# Altium PCB HumRigid1.PcbDoc
Units mm, origin at the board's own origin, x right, y up, seen from the top; angles counter-clockwise.
Board outline 100 x 100 mm, 4 copper layers (Top Layer, Layer 1, Layer 2, Bottom Layer), stack 0.603 mm thick; 72 components, 57 nets, 298 pads, 221 vias.
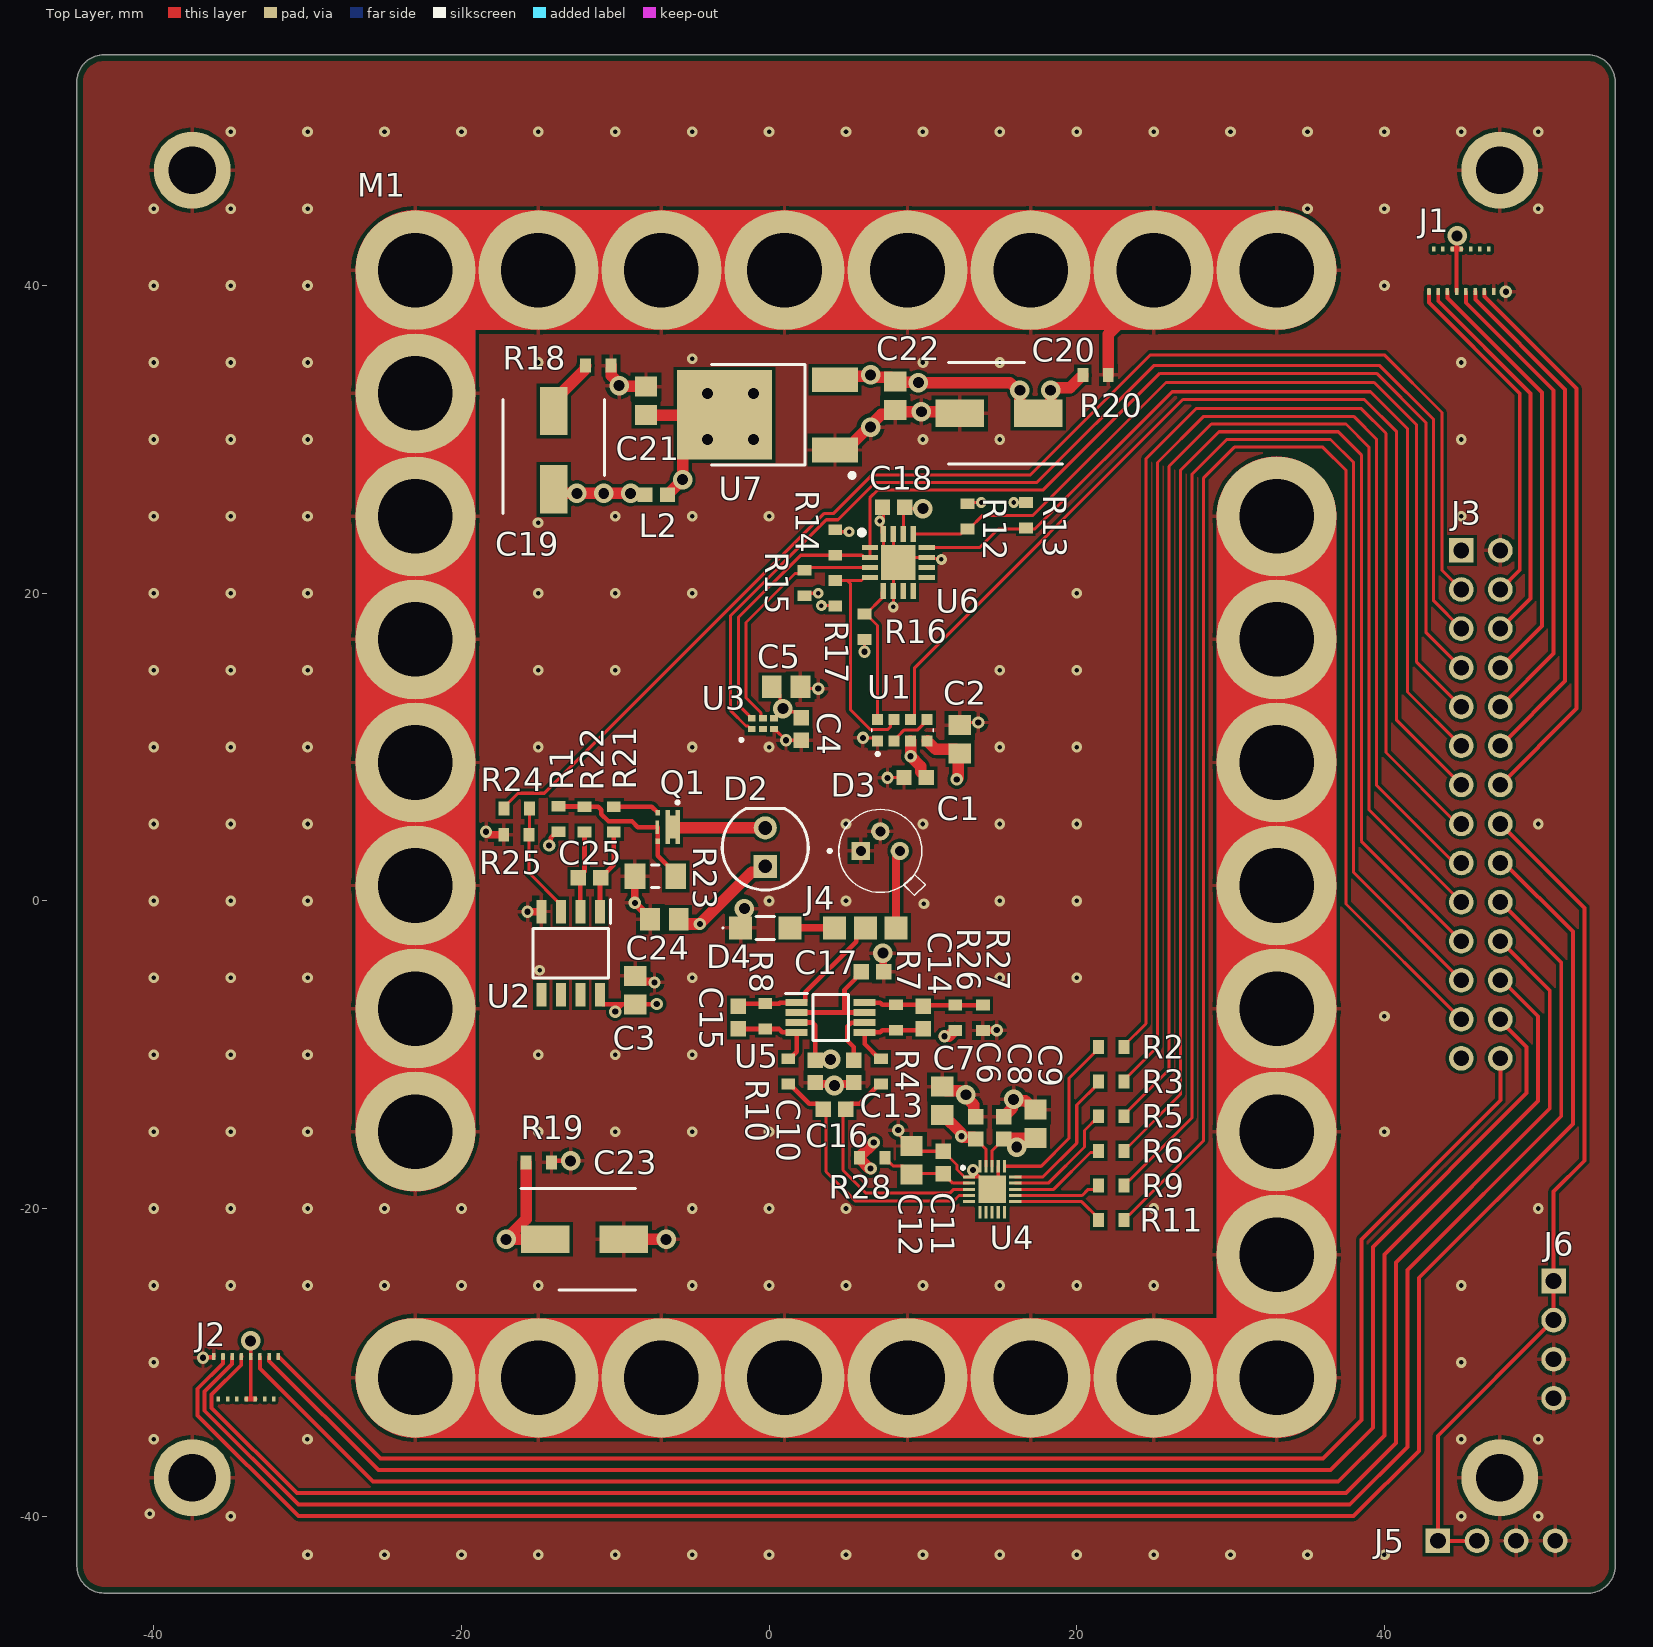
[diagram p0: Top Layer view]
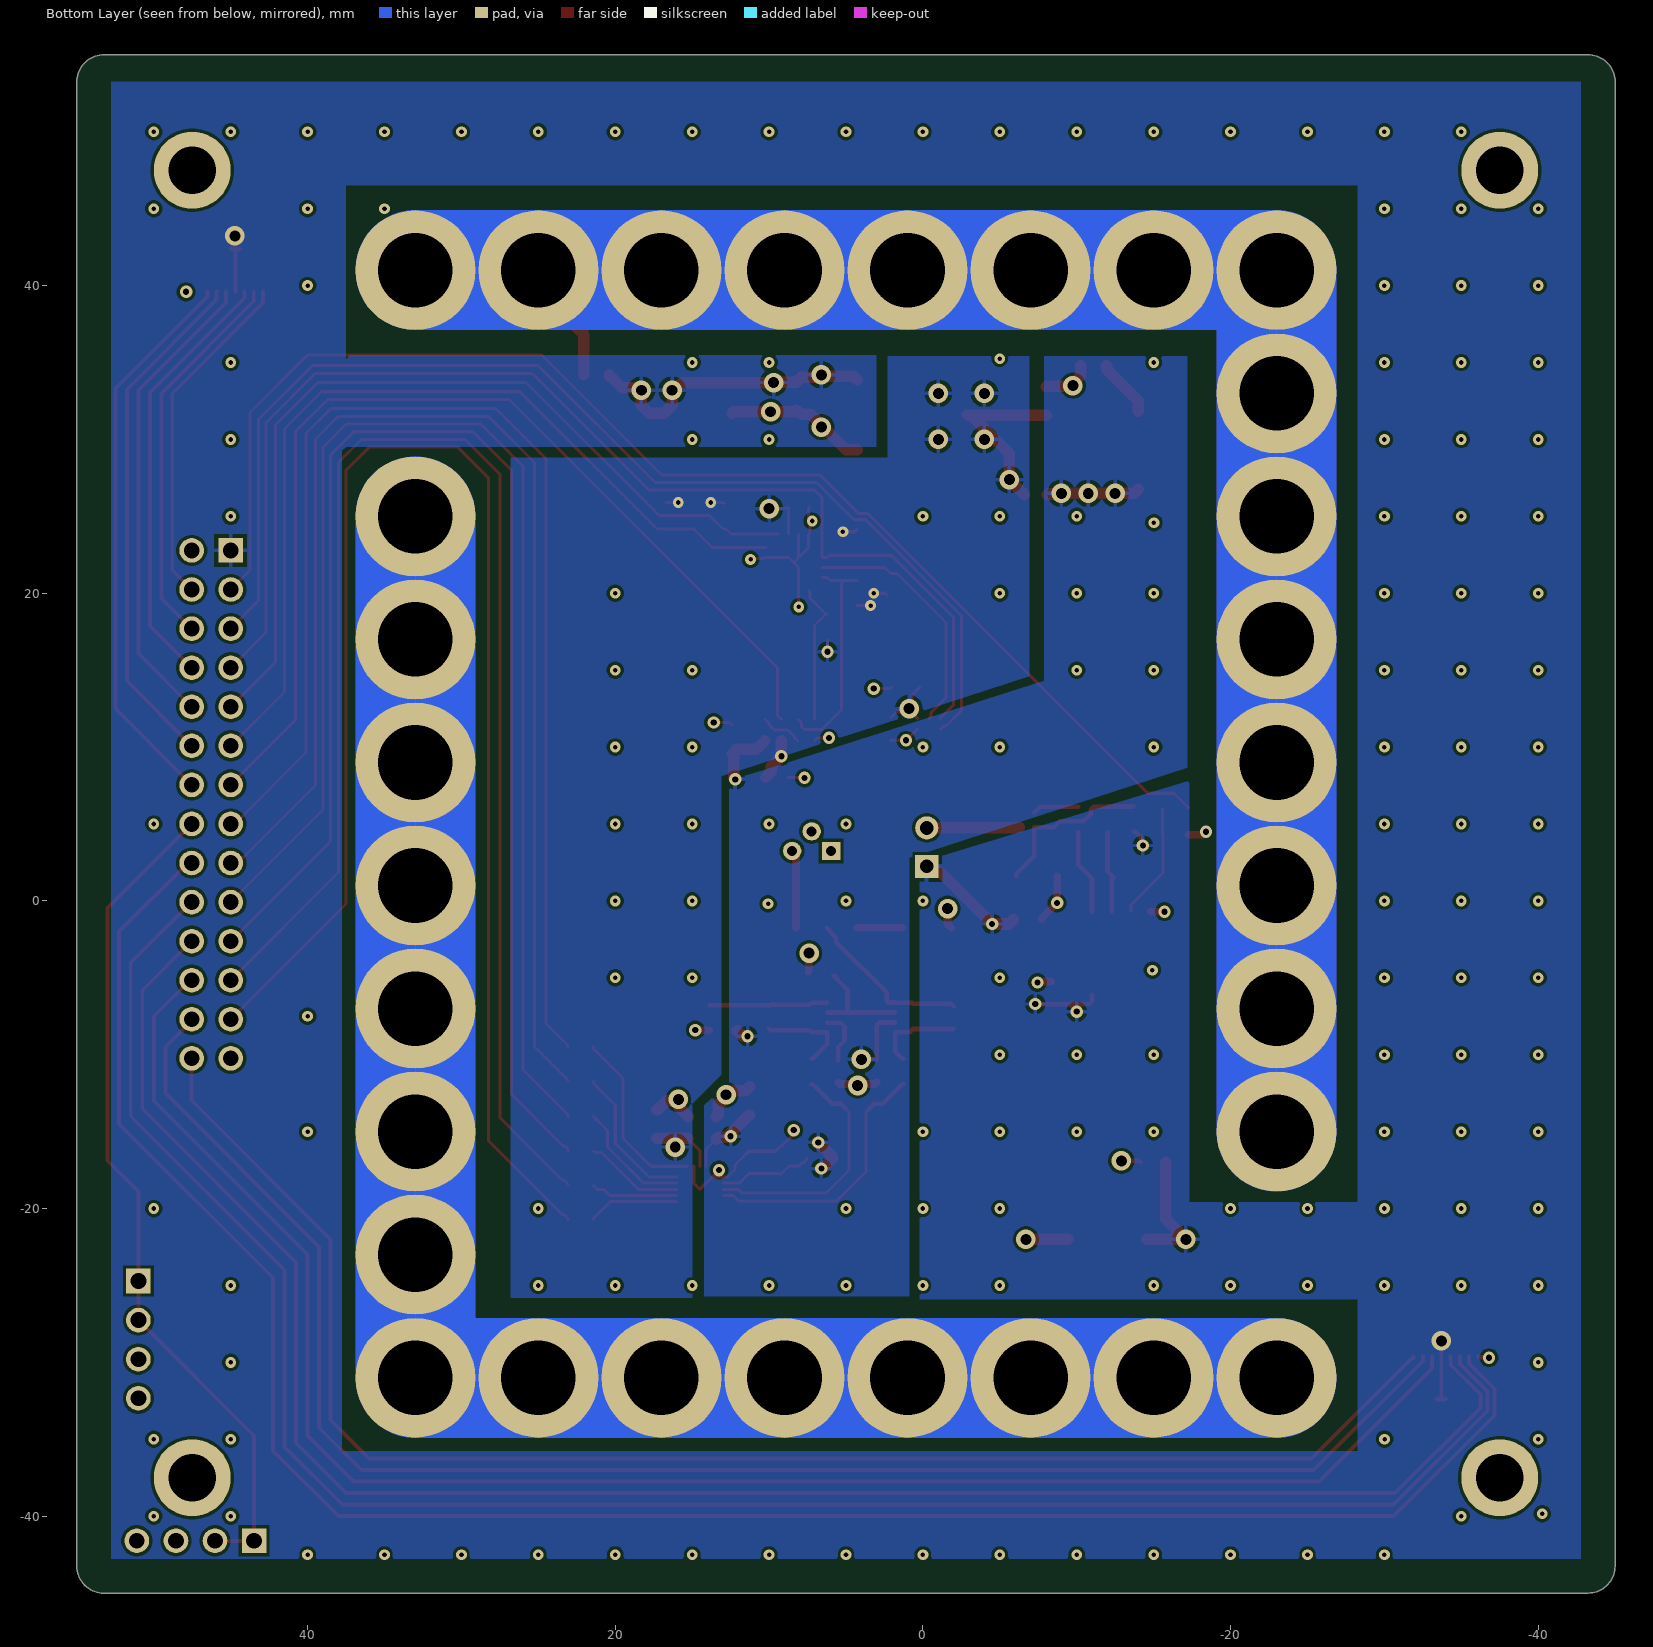
[diagram p1: Bottom Layer view, seen from below]
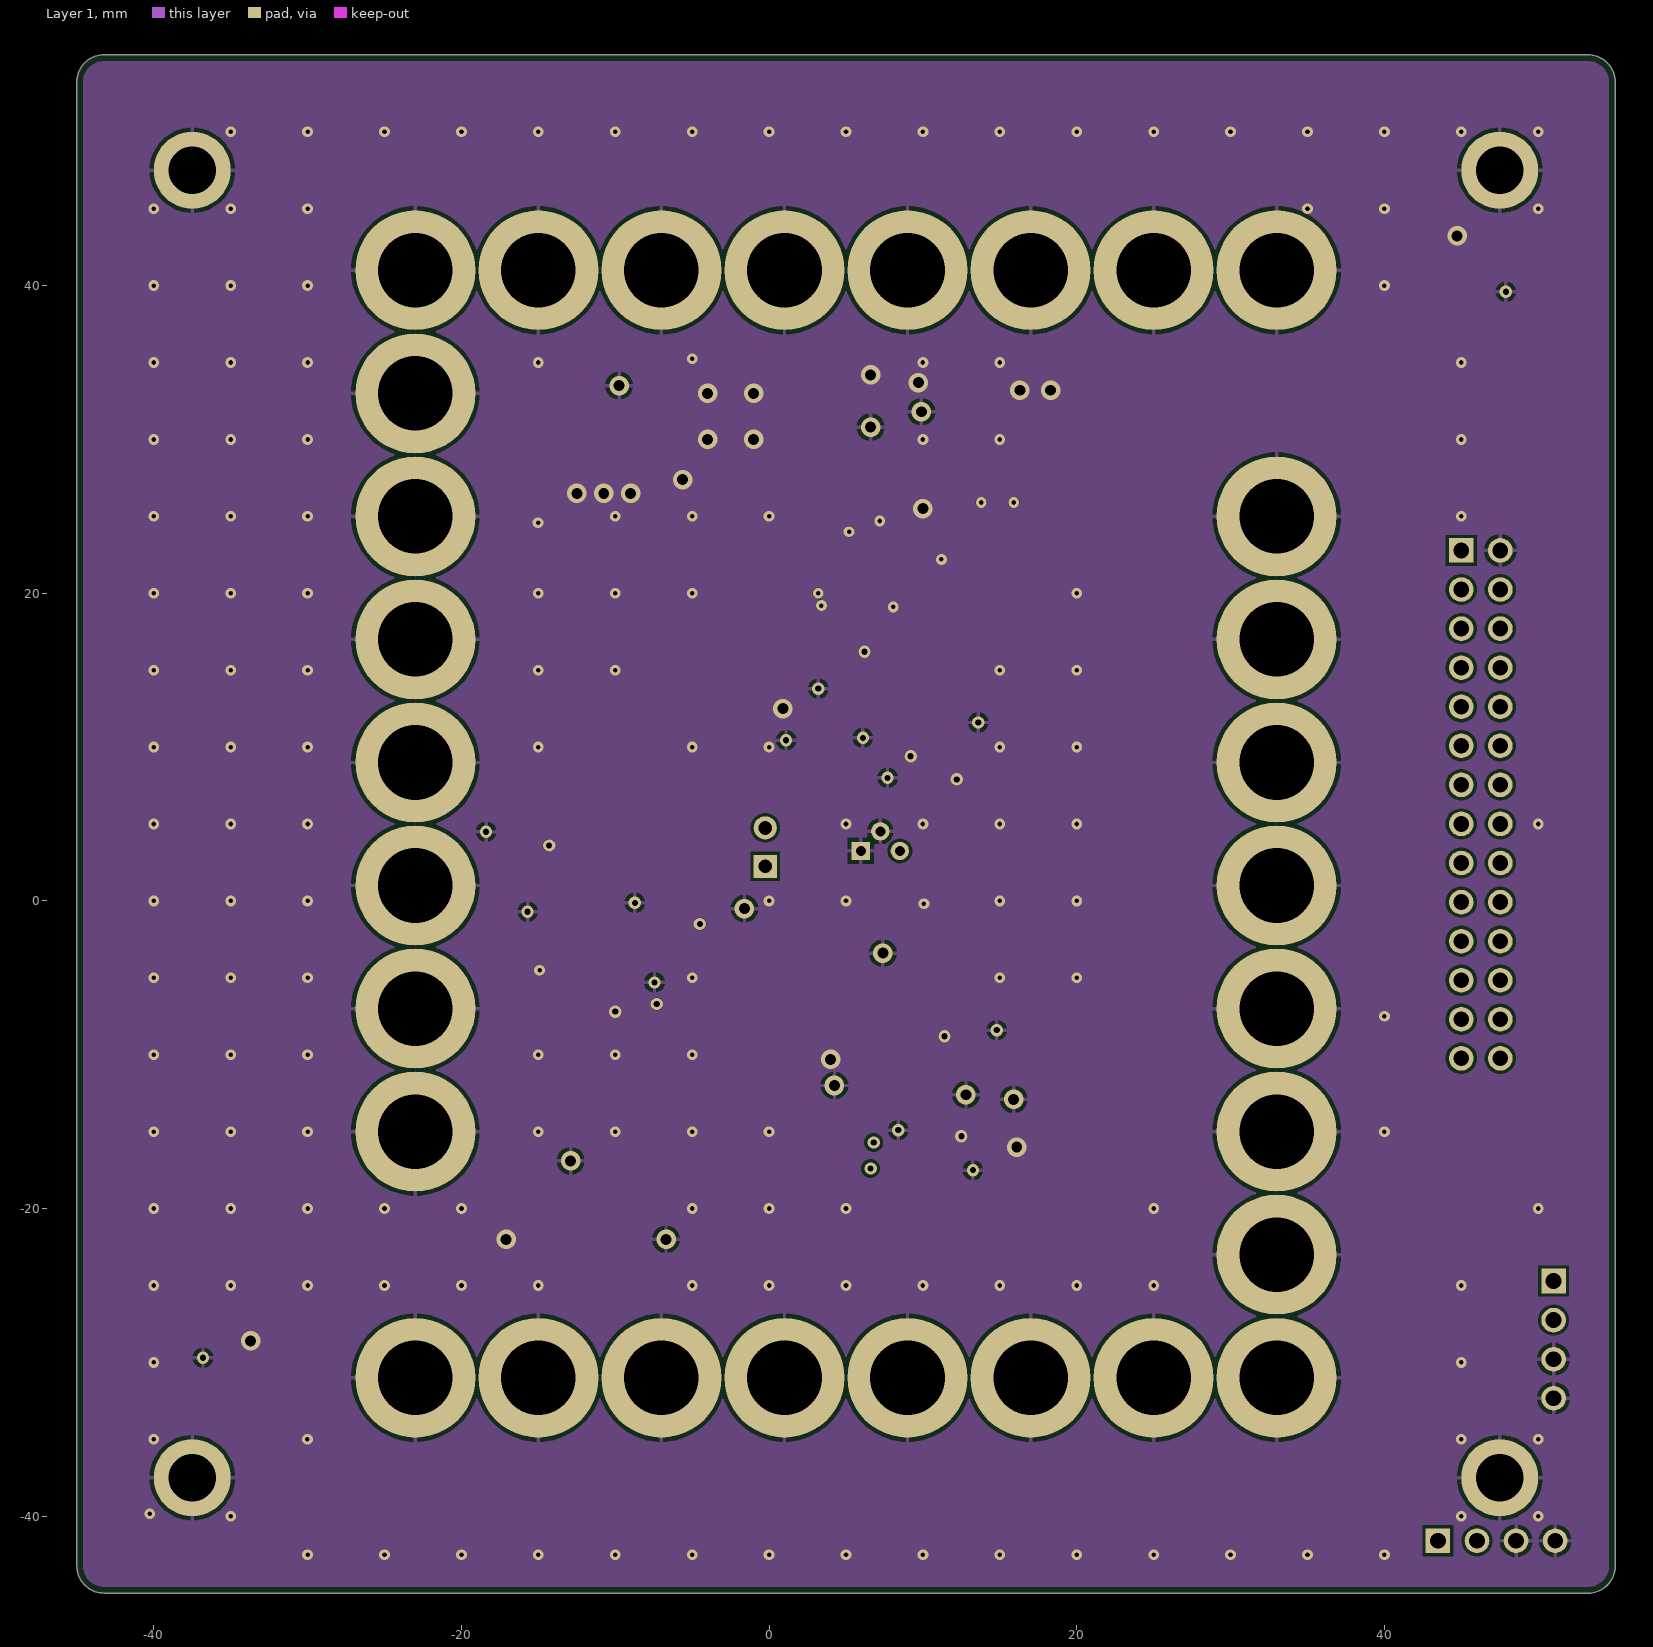
[diagram p2: Layer 1]
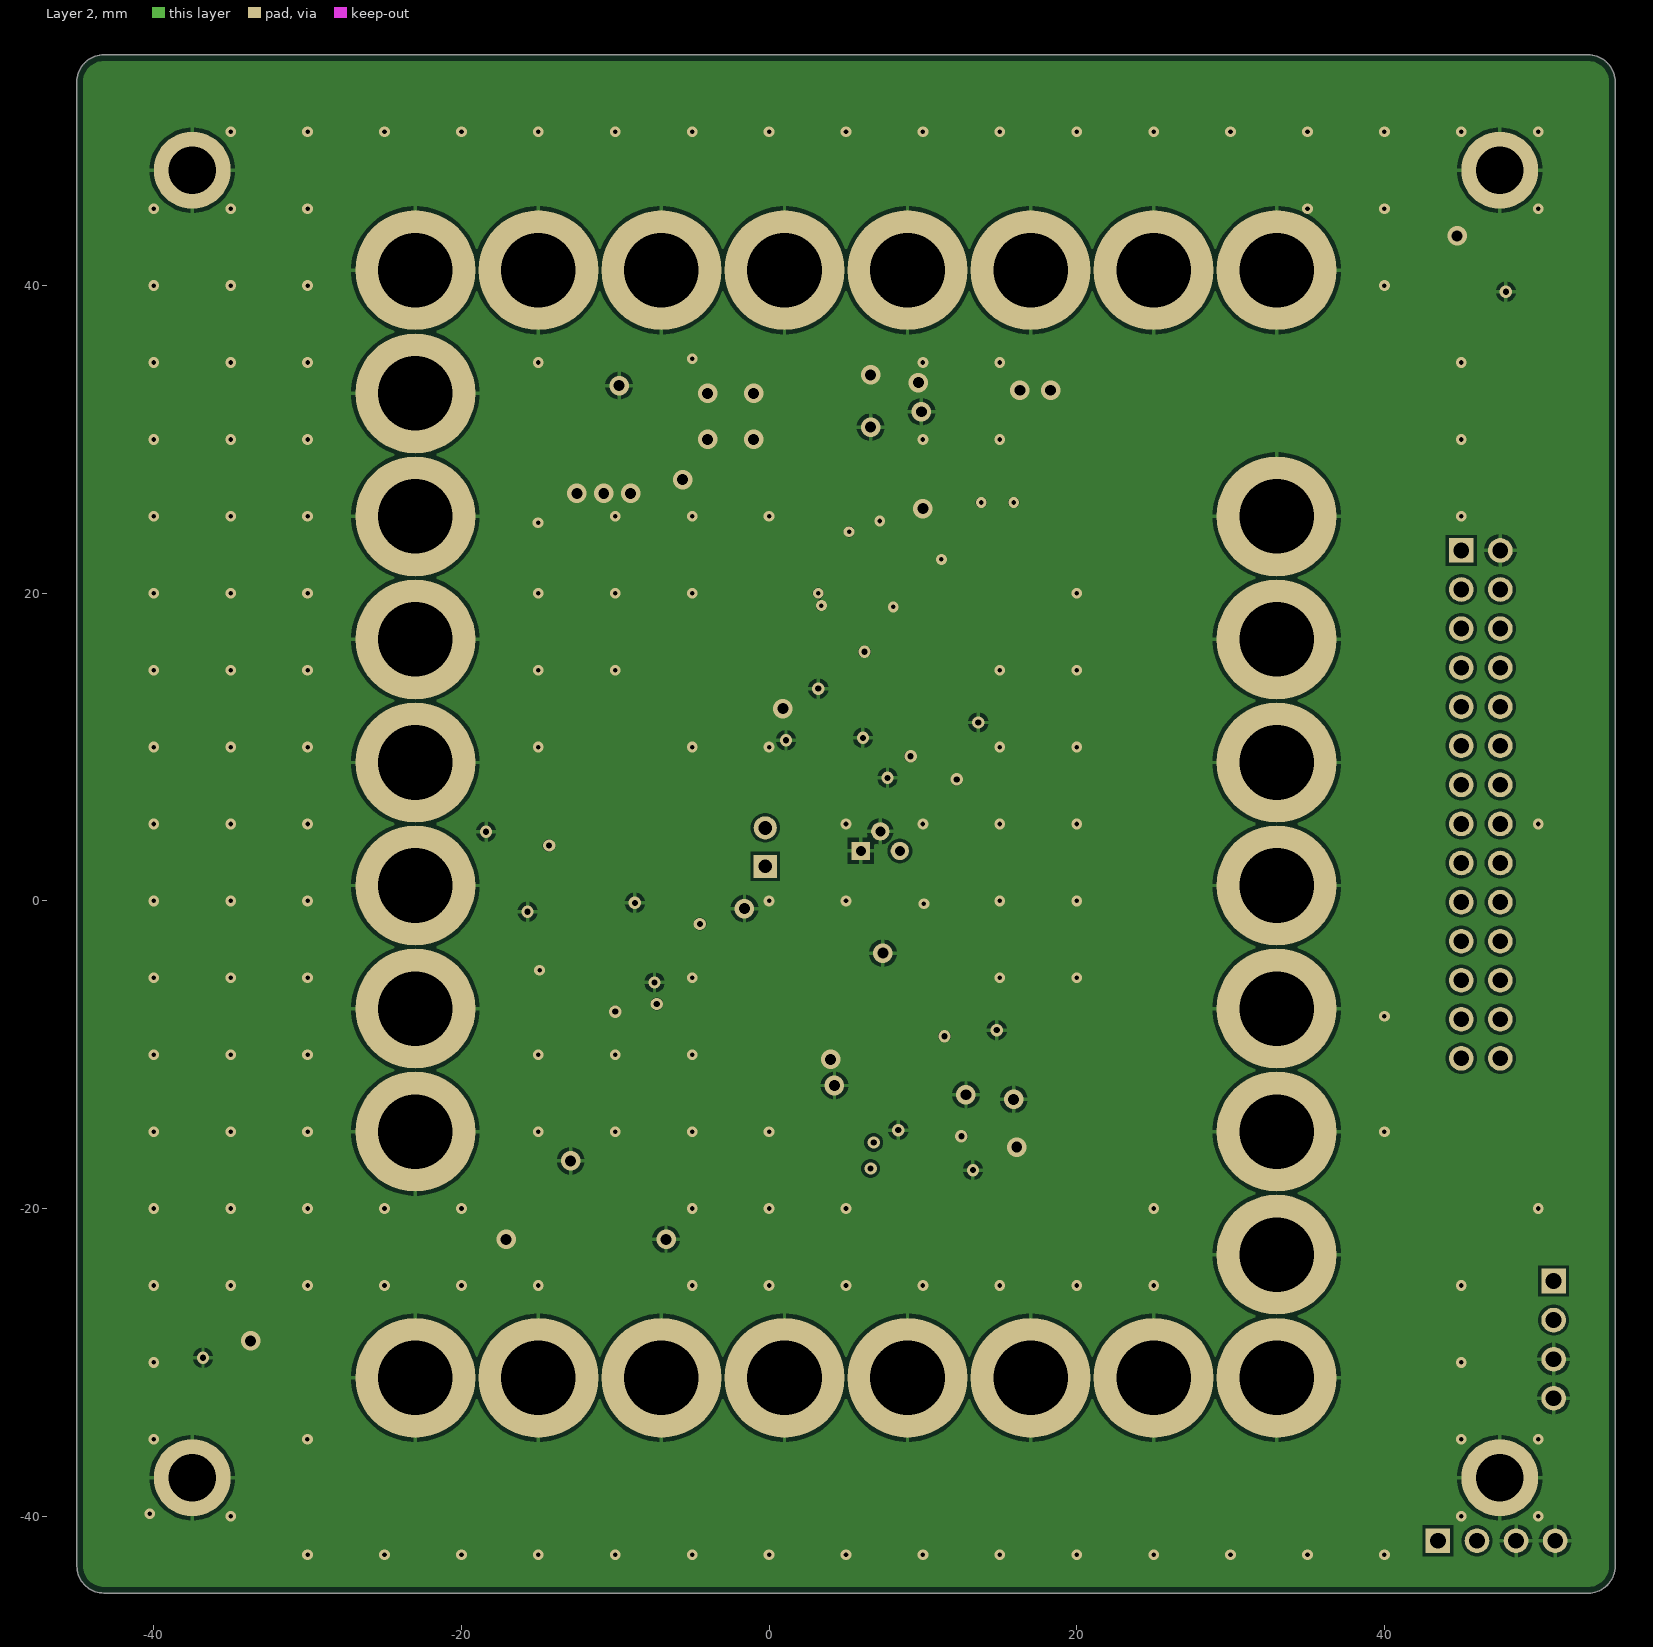
[diagram p3: Layer 2]

## Layer stack, top to bottom
Top Solder: solder mask 0.0102, Solder Resist, Dk 3.5
Top Layer: signal copper 0.0356
Dielectric 2: prepreg 0.0711, PP-006, Dk 4.1
Layer 1: signal copper 0.035
Dielectric 1: dielectric 0.32, FR-4, Dk 4.8
Layer 2: signal copper 0.035
Dielectric 3: prepreg 0.0711, PP-006, Dk 4.1
Bottom Layer: signal copper 0.0356
Bottom Solder: solder mask 0.0102, Solder Resist, Dk 3.5

## Board outline
-43.242,-44.995 cw(c-43.242,-43.242) -44.995,-43.242 -45,-43.247 -45,53.247 cw(c-43.247,53.247) -43.247,55 53.247,55 cw(c53.247,53.247) 55,53.247 55,-43.247 cw(c53.247,-43.247) 53.247,-45

## Design rules (kind name [scope] priority, off if disabled: settings)
BoardOutlineClearance [All] p1: gap=0.4 ignorepadtopadclearanceinfootprint=FALSE
Clearance "Stitching GND" [IsStitchingVia and InNet('GND') vs (IsVia and (Not IsStitchingVia)) Or IsPad] p1: gap=0.127 ignorepadtopadclearanceinfootprint=FALSE
Clearance [All] p2: gap=0.2 ignorepadtopadclearanceinfootprint=TRUE
ComponentClearance [All] p1: gap=0.1 collisioncheckmode=3 verticalgap=0.1 showdistances=FALSE
HoleSize [All] p1: absolutevalues=TRUE maxlimit=6.3 minlimit=0.25 maxpercent=80.000 minpercent=20.000
HoleToHoleClearance [All] p1: gap=0.5 allowstackedmicrovias=TRUE
MinimumAnnularRing MinimumAnnularRing_1 [All] p1: minimumring=0.2
MinimumSolderMaskSliver [All] p1: minsoldermaskwidth=0.1
PolygonConnect [All] p1: connectstyle=Relief reliefconductorwidth=0.254 reliefentries=4 polygonreliefangle="90 Angle" airgapwidth=0.254
RoutingVias [All] p1: holewidth=0.711 width=1.27 viastyle="Through Hole" minholewidth=0.711 minwidth=1.27 maxholewidth=0.711 maxwidth=1.27 useviatemplates=TRUE viatemplateguid#1={AA8A8B98-EA09-48E4-959E-AF0A8588C3B1} viatemplateguid#2={8F1D271C-3B78-4A61-982A-85DCF1A609F4} viatemplatename#1=v70h30_459724820 viatemplatename#2=v80h40
SilkToSilkClearance [All] p1: silktosilkclearance=0.1
SilkToSolderMaskClearance [IsPad] p1: minsilkscreentomaskgap=0.15 clearancetoexposedcopper=TRUE
SolderMaskExpansion [All] p1: expansion=0.102 istentingtop=FALSE
Width [All] p1: maxlimit=10 minlimit=0.1 preferedwidth=0.254
24 further rules are at their usual default settings.

## Classes and differential pairs
component class HumRigid1_mech: M1

## Components (designator, comment, footprint, x,y, rotation, side; value= is the part's Value field where it differs from the comment)
C1 "100nF" CAP_SM0603_YAGEOCC2_N 9.5,8.025 r180 top
C2 "10uF" CAP_SM0805_YAGEOCC2_N 12.4,10.5 r90 top
C3 "10uF" CAP_SM0805_YAGEOCC2_N -8.7,-5.8 r90 top
C4 "100nF" CAP_SM0603_YAGEOCC2_N 2.1,11.17 r270 top
C5 "10uF" CAP_SM0805_YAGEOCC2_N 1.1,13.92 r0 top
C6 "100nF" CAP_SM0603_YAGEOCC2_N 13.434,-14.75 r270 top
C7 "10uF" CAP_SM0805_YAGEOCC2_N 11.25,-13 r270 top
C8 "100nF" CAP_SM0603_YAGEOCC2_N 15.25,-14.75 r270 top
C9 "10uF" CAP_SM0805_YAGEOCC2_N 17.316,-14.5 r270 top
C10 "100nF" CAP_SM0603_YAGEOCC2_N 3,-11.082 r270 top
C11 "100nF" CAP_SM0603_YAGEOCC2_N 11.321,-17 r90 top
C12 "10uF" CAP_SM0805_YAGEOCC2_N 9.254,-16.86 r90 top
C13 "100nF" CAP_SM0603_YAGEOCC2_N 5.5,-11.082 r270 top
C14 "2p7F" CAP_SM0603_YAGEOCC2_N 10.016,-7.579 r90 top
C15 "2p7F" CAP_SM0603_YAGEOCC2_N -2.004,-7.579 r90 top
C16 "47nF" CAP_SM0603_YAGEOCC2_N 4.25,-13.533 r180 top
C17 "100nF" CAP_SM0603_YAGEOCC2_N 6.727,-4.6 r0 top
C18 "100nF" CAP_SM0603_YAGEOCC2_N 8.1,25.6 r0 top
C19 "68u" CAPAE660X770N -14,29.3 r90 top
C20 "100u" CAPAE660X770N 14.95,31.7 r180 top
C21 "10uF" CAP_SM0805_YAGEOCC2_N -8.003,32.5 r270 top
C22 "10uF" CAP_SM0805_YAGEOCC2_N 8.2,32.827 r90 top
C23 "100u" CAPAE660X770N -12,-22 r0 top
C24 "10uF" CAP_SM0805_YAGEOCC2_N -6.8,-1.2 r180 top
C25 "4.7nF" CAP_SM0603_YAGEOCC2_N -11.673,1.5 r0 top
D2 "MTE5116N5" MTE5116N5 -0.25,3.5 r90 top
D3 "MTPD1346D-100" MTPD1346D100 5.96,3.25 r0 top
D4 "SD0090-3111-185" SD00903111185 -0.25,-1.75 r180 top
J1 "AYF331535" ? 45,41 r0 top
J2 "AYF331535" ? -34,-31 r180 top
J3 "PinHeader_2x14" PINHEADER_2X14_2.54MM 45,22.784 r0 top
J4 "SolderJumper_3" SOLDERJUMPER3_1 6.256,-1.75 r270 top
J5 "PinHeader_1x4" PINHEADER_1X4_2.54MM 43.48,-41.6 r90 top
J6 "PinHeader_1x4" PINHEADER_1X4_2.54MM 51,-24.71 r0 top
L2 "BLM18SP300SN1D" CHIP2PINSM127P600-8N -7.335,26.405 r0 top
M1 "Lego_Mount" Lego_Mount 5,5 r0 top
Q1 "SIA440DJ-T1-GE3" SIA440DJT1GE3 -6.6,4.8 r180 top
R1 "10K" RES_SM0603_YAGEORC_N -13.7,5.327 r270 top
R2 "10R" RES_SM0603_YAGEORC_N 22.25,-9.5 r0 top
R3 "10R" RES_SM0603_YAGEORC_N 22.25,-11.75 r0 top
R4 "150R" RES_SM0603_YAGEORC_N 7.266,-11.082 r270 top
R5 "10R" RES_SM0603_YAGEORC_N 22.25,-14 r0 top
R6 "10R" RES_SM0603_YAGEORC_N 22.25,-16.25 r0 top
R7 "10M" RES_SM0603_YAGEORC_N 8.25,-7.579 r270 top
R8 "10M" RES_SM0603_YAGEORC_N -0.25,-7.502 r270 top
R9 "10R" RES_SM0603_YAGEORC_N 22.25,-18.5 r0 top
R10 "150R" RES_SM0603_YAGEORC_N 1.246,-11.082 r270 top
R11 "10R" RES_SM0603_YAGEORC_N 22.25,-20.75 r0 top
R12 "10K" RES_SM0603_YAGEORC_N 12.9,25 r90 top
R13 "10K" RES_SM0603_YAGEORC_N 16.7,25.073 r90 top
R14 "10K" RES_SM0603_YAGEORC_N 4.3,23.3 r90 top
R15 "10K" RES_SM0603_YAGEORC_N 2.3,20.673 r270 top
R16 "10K" RES_SM0603_YAGEORC_N 6.2,17.828 r270 top
R17 "10K" RES_SM0603_YAGEORC_N 4.3,20 r270 top
R18 "1R" RES_SM0603_YAGEORC_N -11.1,34.8 r180 top
R19 "33K" RES_SM0603_YAGEORC_N -14.973,-17 r180 top
R20 "33K" RES_SM0603_YAGEORC_N 21.227,34.2 r180 top
R21 "150R" RES_SM0603_YAGEORC_N -10.1,5.3 r90 top
R22 "1K" RES_SM0603_YAGEORC_N -12,5.3 r90 top
R23 "0R680" MFLA1206 -7.4,1.6 r0 top
R24 "1K" RES_SM0603_YAGEORC_N -16.4,6 r180 top
R25 "120R" RES_SM0603_YAGEORC_N -16.427,4.3 r0 top
R26 "100K" RES_SM0603_YAGEORC_N 12.1,-7.6 r270 top
R27 "150R" RES_SM0603_YAGEORC_N 13.9,-7.6 r90 top
R28 "1K" RES_SM0603_YAGEORC_N 6.707,-16.7 r0 top
U1 "VCNL4040M3OE" VCNL4040M3OE 8.662,11.1 r270 top
U2 "TLC272CDR" SOIC127P600X175-8N -12.9,-3.4 r270 top
U3 "VCNL36825T" VCNL36825T -0.4,11.52 r90 top
U4 "MCP3561RT-E_NC" QFN40P300X300X60-21N-D 14.5,-18.75 r0 top
U5 "LTC1992CMS8#PBF" SOP65P490X110-8N 4,-7.579 r0 top
U6 "PCA9546ARGVR" QFN65P400X400X100-17N-D 8.4,22 r0 top
U7 "NCP1117DT33G" NCP1117DT33G -0.7,31.6 r0 top

## Footprints (in the part's own frame and the unit in brackets; to place one, negate y for a bottom-side part, rotate by r counter-clockwise, add the part's x,y. Pads: shape width x height; smd on the part's side, far side on the other; paste and mask are expansions set on the pad)
CAP_SM0603_YAGEOCC2_N [mm] "Capacitor, Yageo CC Class2, SM0603, IPC Medium Density"
  rect 1x1 smd: 1(-0.727,0) 2(0.727,0)
  body extent -0.9,-0.5 0.9,0.5, height 0.9
CAP_SM0805_YAGEOCC2_N [mm] "Capacitor, Yageo CC Class2, SM0805, IPC Medium Density"
  rect 1.3x1.45 smd: 1(-0.927,0) 2(0.927,0)
  body extent -1.1,-0.72 1.1,0.72, height 1.45
CAPAE660X770N [mm]
  rect 3.15x1.8 smd: 1(-2.55,0) 2(2.55,0)
  silkscreen extent -4.13,-3.3 3.3,3.3, body extent -3.4,-3.4 3.4,3.4, height 7.7
CHIP2PINSM127P600-8N [mm]
  rect 0.99x0.94 smd: 1(-0.735,0) 2(0.735,0)
  body extent -0.85,-0.45 0.85,0.45, height 0.7
Lego_Mount [mm]
  round 7.8 hole 4.85: 1(-28,-36) 1(-28,-20) 1(-28,-12) 1(-28,-4) 1(-28,4) 1(-28,12) 1(-28,20) 1(-28,28) 1(-28,36) 1(-20,-36) 1(-20,36) 1(-12,-36) 1(-12,36) 1(-4,-36) 1(-4,36) 1(4,-36) 1(4,36) 1(12,-36) 1(12,36) 1(20,-36) 1(20,36) 1(28,-36) 1(28,-28) 1(28,-20) 1(28,-12) 1(28,-4) 1(28,4) 1(28,12) 1(28,20) 1(28,36)
  Top Layer lines w7.8: -28,-36 28,-36 28,20 ; -28,-20 -28,36 -20,36 -12,36 -4,36 4,36 12,36 20,36 28,36
  Bottom Layer lines w7.8: -28,-36 28,-36 28,20 ; -28,-20 -28,36 -20,36 -12,36 -4,36 4,36 12,36 20,36 28,36
MFLA1206 [mm]
  rect 1.35x1.65 smd: 1(-1.325,0) 2(1.325,0)
  silkscreen extent -0.25,-0.72 0.25,0.72, body extent -1.65,-0.82 1.65,0.82, height 0.65
MTE5116N5 [mm]
  rect 1.5x1.5 hole 0.9: 1(-1.25,0)
  round 1.5 hole 0.9: 2(1.25,0)
  silkscreen extent -2.8,-2.79 2.5,2.79, body extent -2.94,-2.95 2.5,2.95, height 8.6
MTPD1346D100 [mm]
  rect 1.192x1.192 hole 0.65: 1(0,0)
  round 1.192 hole 0.65: 2(2.54,0) 3(1.27,1.27)
  silkscreen extent -2.07,-2.89 4.2,2.7, body extent -1.46,-2.89 4.12,2.7, height 2.8
NCP1117DT33G [mm]
  rect 3x1.6 smd: 1(4.982,-2.285) 3(4.982,2.285)
  rect 6.2x5.8 smd: 2(-2.198,0)
  silkscreen extent -3.05,-4.13 6.29,3.27, body extent -4.68,-3.33 5.74,3.39, height 2.69
PINHEADER_1X4_2.54MM [mm]
  rect 1.6x1.6 hole 1.02: 1(0,0)
  round 1.6 hole 1.02: 2(0,-2.54) 3(0,-5.08) 4(0,-7.62)
PINHEADER_2X14_2.54MM [mm]
  rect 1.6x1.6 hole 1.02: 1(0,0)
  round 1.6 hole 1.02: 2(0,-2.54) 3(0,-5.08) 4(0,-7.62) 5(0,-10.16) 6(0,-12.7) 7(0,-15.24) 8(0,-17.78) 9(0,-20.32) 10(0,-22.86) 11(0,-25.4) 12(0,-27.94) 13(0,-30.48) 14(0,-33.02) 15(2.54,-33.02) 16(2.54,-30.48) 17(2.54,-27.94) 18(2.54,-25.4) 19(2.54,-22.86) 20(2.54,-20.32) 21(2.54,-17.78) 22(2.54,-15.24) 23(2.54,-12.7) 24(2.54,-10.16) 25(2.54,-7.62) 26(2.54,-5.08) 27(2.54,-2.54) 28(2.54,0)
QFN40P300X300X60-21N-D [mm]
  rect 0.8x0.2 smd: 1(-1.5,0.8) 2(-1.5,0.4) 3(-1.5,0) 4(-1.5,-0.4) 5(-1.5,-0.8) 11(1.5,-0.8) 12(1.5,-0.4) 13(1.5,0) 14(1.5,0.4) 15(1.5,0.8)
  rect 0.2x0.8 smd: 6(-0.8,-1.5) 7(-0.4,-1.5) 8(0,-1.5) 9(0.4,-1.5) 10(0.8,-1.5) 16(0.8,1.5) 17(0.4,1.5) 18(0,1.5) 19(-0.4,1.5) 20(-0.8,1.5)
  rect 1.8x1.8 smd: 21(0,0)
  silkscreen extent -2,1.3 -1.8,1.5, body extent -1.55,-1.55 1.55,1.55, height 0.6
QFN65P400X400X100-17N-D [mm]
  rect 1.05x0.35 smd: 1(-1.85,0.975) 2(-1.85,0.325) 3(-1.85,-0.325) 4(-1.85,-0.975) 9(1.85,-0.975) 10(1.85,-0.325) 11(1.85,0.325) 12(1.85,0.975)
  rect 0.35x1.05 smd: 5(-0.975,-1.85) 6(-0.325,-1.85) 7(0.325,-1.85) 8(0.975,-1.85) 13(0.975,1.85) 14(0.325,1.85) 15(-0.325,1.85) 16(-0.975,1.85)
  rect 2.26x2.26 smd: 17(0,0)
  silkscreen extent -2.54,1.79 -2.21,2.11, body extent -1.99,-2.06 2.01,1.94, height 1
RES_SM0603_YAGEORC_N [mm] "Resistor, Yageo RC_L, SM0603, IPC Medium Density"
  rect 0.7x0.9 smd: 1(-0.827,0) 2(0.827,0)
  body extent -0.85,-0.45 0.85,0.45, height 0.55
SD00903111185 [mm]
  rect 1.5x1.5 smd: 1(1.6,0) 2(-1.6,0)
  silkscreen extent -0.6,-0.75 2.8,0.75, body extent -2.2,-0.75 2.2,0.75, height 1.4
SIA440DJT1GE3 [mm]
  rect 0.3x0.35 smd: 1(-0.65,-0.925) 2(0,-0.925) 3(0.65,-0.925) 4(0.65,0.925) 5(0,0.925) 6(-0.65,0.925)
  rect 0.95x1.5 smd: P1(-0.325,0)
  rect 0.235x0.87 smd: P2(0.668,0)
  silkscreen extent -0.75,-1.7 -0.55,-1.5, body extent -1.02,-1.07 1.03,1.07, height 0.9
SOIC127P600X175-8N [mm]
  rect 1.528x0.65 smd: 1(-2.711,1.905) 2(-2.711,0.635) 3(-2.711,-0.635) 4(-2.711,-1.905) 5(2.711,-1.905) 6(2.711,-0.635) 7(2.711,0.635) 8(2.711,1.905)
  silkscreen extent -3.47,-2.45 1.6,2.58, body extent -3.01,-2.45 3.01,2.45, height 1.63
SOLDERJUMPER3_1 [mm]
  rect 1.5x1.5 smd: 1(0,0) 2(0,2) 3(0,-2)
SOP65P490X110-8N [mm]
  rect 1.425x0.45 smd: 1(-2.212,0.975) 2(-2.212,0.325) 3(-2.212,-0.325) 4(-2.212,-0.975) 5(2.212,-0.975) 6(2.212,-0.325) 7(2.212,0.325) 8(2.212,0.975)
  silkscreen extent -2.93,-1.5 1.15,1.55, body extent -2.45,-1.5 2.45,1.5, height 1.1
VCNL4040M3OE [mm]
  rect 0.7x0.725 smd: 1(0.7,-1.612) 2(0.7,-0.537) 3(0.7,0.538) 4(0.7,1.613) 5(-0.7,1.613) 6(-0.7,0.538) 7(-0.7,-0.537) 8(-0.7,-1.612)
  silkscreen extent -0.1,-2 1.65,2, body extent -1,-2 1,2, height 1.25
VCNL36825T [mm]
  rect 0.4x0.5 smd: 1(-0.35,0.725) 2(-0.35,0) 3(-0.35,-0.725) 4(0.35,-0.725) 5(0.35,0) 6(0.35,0.725)
  silkscreen extent -1.15,1.3 -0.95,1.5, body extent -0.63,-1 0.63,1, height 0.7
? [mm] "AYF331535 FFC & FPC-Steckverbinder CONNECTOR SURFACE MOUNT"
  rrect20% 0.23x0.44 smd: 1(-2.1,-1.38) 3(-1.5,-1.38) 5(-0.9,-1.38) 7(-0.3,-1.38) 9(0.3,-1.38) 11(0.9,-1.38) 13(1.5,-1.38) 15(2.1,-1.38)
  rrect20% 0.23x0.34 smd: 2(-1.8,1.38) 4(-1.2,1.38) 6(-0.6,1.38) 8(0,1.38) 10(0.6,1.38) 12(1.2,1.38) 14(1.8,1.38)
  body extent -3,-1.48 3,1.48, height 1.84

## Part data
C1 C4 C6 C8 C10 C11 C13 C17 C18: library part CC0603KRX7R9BB104, "CAP 100nF SM0603 X7R 50V YAGEO CC2", Manufacturer=Yageo, Package=0603, Supplier Part Number 1=1362556, Tolerance (%)=10, Voltage Rating (Volts)=50, Category=Capacitor, ComponentLink1Description="Manufacturer Website", ComponentLink1URL=http://www.yageo.com, Manufacturer Part Number=CC0603KRX7R9BB104, Supplier 1=Farnell, Supplier 2=Mouser, Supplier Part Number 2=603-CC603KRX7R9BB104
C2 C3 C5 C7 C9 C12 C21 C22 C24: library part CC0805KKX5R8BB106, "CAP 10uF SM0805 X5R 16V YAGEO CC2", Manufacturer=Yageo, Manufacturer Part Number=CC0805KKX7R8BB225, Package=0805, Supplier Part Number 1=1458904, Tolerance (%)=10, Voltage Rating (Volts)=25, Category=Capacitor, ComponentLink1Description="Manufacturer Website", ComponentLink1URL=http://www.yageo.com, Supplier 1=Farnell, Supplier 2=Digi-Key
C14 C15: library part CC0603CRNPO9BN2R7, "CAP 2.7pF (2p7F) SM0603 NPO 50V YAGEO CC2", Manufacturer=Yageo, Package=0603, Supplier Part Number 1=721890, Tolerance (%)=10, Voltage Rating (Volts)=50, Category=Capacitor, ComponentLink1Description="Manufacturer Website", ComponentLink1URL=http://www.yageo.com, Manufacturer Part Number=CC0603CRNPO9BN2R7, Supplier 1=Farnell, Supplier 2=Digi-Key
C16: library part CC0603KRX7R9BB473, "CAP 47nF SM0603 X7R 50V YAGEO CC2", Manufacturer=Yageo, Manufacturer Part Number=CC0603KRX7R9BB223, Package=0603, Supplier Part Number 1=311-1427-1-ND, Tolerance (%)=10, Voltage Rating (Volts)=50, Category=Capacitor, ComponentLink1Description="Manufacturer Website", ComponentLink1URL=http://www.yageo.com, Supplier 1=Digi-Key, Supplier 2=Digi-Key, Supplier 3=Mouser, Supplier Part Number 2=311-1427-6-ND, Supplier Part Number 3=603-C0603KRX7R9BB473
C19: library part 865080545011, "Wurth Elektronik 68uF 35 V dc Aluminium Electrolytic Capacitor, WCAP-ASLI Series 2000h 6.3 (Dia.) x 7.55mm", Manufacturer_Name="Wurth Elektronik", Manufacturer_Part_Number=865080545012, Mouser Part Number=710-865080545012, Supplier Part Number 1=732-8510-1-ND, Datasheet Link=http://katalog.we-online.de/pbs/datasheet/865080545012.pdf, Geometry.Height=7.7mm, Mouser Price/Stock=https://www.mouser.co.uk/ProductDetail/Wurth-Elektronik/865080545012?qs=0KOYDY2FL297tvB6LOdg5A%3D%3D, Supplier 1=Digi-Key, Supplier 2=Digi-Key, Supplier 3=Mouser, Supplier Part Number 2=732-8510-6-ND, Supplier Part Number 3=710-865080545011
C20 C23: library part 865080545012, "Wurth Elektronik 100uF 35 V dc Aluminium Electrolytic Capacitor, WCAP-ASLI Series 2000h 6.3 (Dia.) x 7.55mm", Manufacturer_Name="Wurth Elektronik", Mouser Part Number=710-865080545012, Supplier Part Number 1=732-8511-1-ND, Datasheet Link=http://katalog.we-online.de/pbs/datasheet/865080545012.pdf, Geometry.Height=7.7mm, Manufacturer_Part_Number=865080545012, Mouser Price/Stock=https://www.mouser.co.uk/ProductDetail/Wurth-Elektronik/865080545012?qs=0KOYDY2FL297tvB6LOdg5A%3D%3D, Supplier 1=Digi-Key, Supplier 2=Digi-Key, Supplier 3=Mouser, Supplier Part Number 2=732-8511-6-ND, Supplier Part Number 3=710-865080545012
C25: library part CC0603KRX7R9BB472, "CAP 4.7nF SM0603 X7R 50V YAGEO CC2", Manufacturer=Yageo, Manufacturer Part Number=CC0603KRX7R9BB223, Package=0603, Supplier Part Number 1=311-1083-1-ND, Tolerance (%)=10, Voltage Rating (Volts)=50, Category=Capacitor, ComponentLink1Description="Manufacturer Website", ComponentLink1URL=http://www.yageo.com, Supplier 1=Digi-Key, Supplier 2=Digi-Key, Supplier 3=Mouser, Supplier Part Number 2=311-1083-6-ND, Supplier Part Number 3=603-C0603KRX7R9BB472
D2: "MTE5116N5 SWIR Infrared Emitter 1650nm", Supplier Part Number 1=1125-MTE5116N5-ND, Supplier 1=Digi-Key, Supplier 2=Mouser, Supplier Part Number 2=193-MTE5116N5
D3: "MTPD1346D-100 High Speed InGaAs PIN Photodiode 600-1750nm", Supplier Part Number 1=1125-1326-ND, Supplier 1=Digi-Key, Supplier 2=Mouser, Supplier Part Number 2=193-MTPD1346D-100
D4: "SD0090-3111-185 SMD InGaAs Photodiode 900-1650nm", Supplier Part Number 1=846-0090-3111-185, Supplier 1=Mouser, Supplier 2=Digi-Key, Supplier 3=Digi-Key, Supplier Part Number 2=209-0090-3111-185CT-ND, Supplier Part Number 3=209-0090-3111-185DKR-ND
J1 J2: "AYF331535 FFC & FPC-Steckverbinder CONNECTOR SURFACE MOUNT", Supplier Part Number 1=769-AYF331535, Supplier 1=Mouser, Supplier 2=Digi-Key, Supplier Part Number 2=255-3053-1-ND
J3: library part PinHeader_2x14_2.54mm_1, "PinHeader_2x14 2.54mm Pitch"
J5 J6: library part PinHeader_1x4_2.54mm, "PinHeader_1x4 2.54mm Pitch"
L2: "Ferrite Beads 0603 30ohm 10% 6A", Manufacturer_Name="Murata Electronics", Mouser Part Number=81-BLM18SP300SN1D, Supplier Part Number 1=490-BLM18SP300SN1DCT-ND, Datasheet Link=http://www.murata.com/~/media/webrenewal/support/library/catalog/products/emc/emifil/c31e.ashx?la=en-gb, Geometry.Height=0.95mm, Manufacturer_Part_Number=BLM18SP300SN1D, Mouser Price/Stock=https://www.mouser.co.uk/ProductDetail/Murata-Electronics/BLM18SP300SN1D?qs=W%2FMpXkg%252BdQ4o%252BOP%252B6m8FYA%3D%3D, Supplier 1=Digi-Key, Supplier 2=Digi-Key, Supplier 3=Mouser, Supplier Part Number 2=490-BLM18SP300SN1DDKR-ND, Supplier Part Number 3=81-BLM18SP300SN1D
Q1: "MOSFET 40V Vds 12V Vgs PowerPAK SC-70", Manufacturer_Name=Vishay, Mouser Part Number=78-SIA440DJ-T1-GE3, Datasheet Link=https://www.arrow.com/en/products/sia440dj-t1-ge3/vishay, Geometry.Height=0.8mm, Manufacturer_Part_Number=SIA440DJ-T1-GE3, Mouser Price/Stock=https://www.mouser.co.uk/ProductDetail/Vishay-Semiconductors/SIA440DJ-T1-GE3?qs=c9a7l%2FSwUkKwNKYQuCLipQ%3D%3D, Supplier 1=Mouser, Supplier 2=Digi-Key, Supplier 3=Digi-Key, Supplier Part Number 1=78-SIA440DJ-T1-GE3, Supplier Part Number 2=SIA440DJ-T1-GE3CT-ND, Supplier Part Number 3=SIA440DJ-T1-GE3DKR-ND
R1 R12 R13 R14 R15 R16 R17: library part RC0603FR-0710KL, "RES 10K SM0603 YAGEO RC_L", Manufacturer=Yageo, Package=0603, Power (Watts)=0.1, Resistance (Ohms)=10000, Supplier Part Number 1=9238603, Tolerance (%)=1, Category=Resistor, ComponentLink1Description="Manufacturer Website", ComponentLink1URL=http://www.yageo.com, Manufacturer Part Number=RC0603FR-0710KL, Supplier 1=Farnell, Supplier 2=Digi-Key, Supplier Part Number 2=311-10.0KHRCT-ND
R2 R3 R5 R6 R9 R11: library part RC0603FR-0710RL, "RES 10R SM0603 YAGEO RC_L", Manufacturer=Yageo, Package=0603, Power (Watts)=0.1, Resistance (Ohms)=10, Supplier Part Number 1=9238247, Tolerance (%)=1, Category=Resistor, ComponentLink1Description="Manufacturer Website", ComponentLink1URL=http://www.yageo.com, Manufacturer Part Number=RC0603FR-0710RL, Supplier 1=Farnell, Supplier 2=Digi-Key, Supplier Part Number 2=311-10.0HRCT-ND
R4 R10 R21 R27: library part RC0603FR-07150RL, "RES 150R SM0603 YAGEO RC_L", Manufacturer=Yageo, Package=0603, Power (Watts)=0.1, Resistance (Ohms)=150, Supplier Part Number 1=9238387, Tolerance (%)=1, Category=Resistor, ComponentLink1Description="Manufacturer Website", ComponentLink1URL=http://www.yageo.com, Manufacturer Part Number=RC0603FR-07150RL, Supplier 1=Farnell, Supplier 2=Digi-Key, Supplier Part Number 2=311-150HRCT-ND
R7 R8: library part RC0603FR-0710ML, "RES 10M SM0603 YAGEO RC_L", Manufacturer=Yageo, Package=0603, Power (Watts)=0.1, Resistance (Ohms)=10000000, Supplier Part Number 1=9238964, Tolerance (%)=1, Category=Resistor, ComponentLink1Description="Manufacturer Website", ComponentLink1URL=http://www.yageo.com, Manufacturer Part Number=RC0603FR-0710ML, Supplier 1=Farnell, Supplier 2=Digi-Key, Supplier Part Number 2=311-10.0MHRCT-ND
R18: library part RC0603FR-071RL, "RES 1R SM0603YAGEO RC_L", Manufacturer=Yageo, Manufacturer Part Number=RC0805FR-0710RL, Package=0805, Power (Watts)=0.125, Resistance (Ohms)=10, Supplier Part Number 1=311-1.00HRCT-ND, Tolerance (%)=1, Category=Resistor, ComponentLink1Description="Manufacturer Website", ComponentLink1URL=http://www.yageo.com, Supplier 1=Digi-Key, Supplier 2=Digi-Key, Supplier 3=Mouser, Supplier Part Number 2=311-1.00HRDKR-ND, Supplier Part Number 3=603-RC0603FR-071RL
R19 R20: library part RC0603FR-0733KL, "RES 33K SM0603 YAGEO RC_L", Manufacturer=Yageo, Package=0603, Power (Watts)=0.1, Resistance (Ohms)=33000, Supplier Part Number 1=9238662, Tolerance (%)=1, Category=Resistor, ComponentLink1Description="Manufacturer Website", ComponentLink1URL=http://www.yageo.com, Manufacturer Part Number=RC0603FR-0733KL, Supplier 1=Farnell, Supplier 2=Digi-Key, Supplier Part Number 2=311-33.0KHRCT-ND
R22 R24 R28: library part RC0603FR-071KL, "RES 1K SM0603 YAGEO RC_L", Manufacturer=Yageo, Package=0603, Power (Watts)=0.1, Resistance (Ohms)=1000, Supplier Part Number 1=9238484, Tolerance (%)=1, Category=Resistor, ComponentLink1Description="Manufacturer Website", ComponentLink1URL=http://www.yageo.com, Manufacturer Part Number=RC0603FR-071KL, Supplier 1=Farnell, Supplier 2=Digi-Key, Supplier Part Number 2=311-1.00KHRCT-ND
R23: library part MFLA1206R6800FS, "RES 0R680 SM1206 Eaton 500mW", Manufacturer=Yageo, Manufacturer Part Number=RC0603FR-07150RL, Package=0603, Power (Watts)=0.1, Resistance (Ohms)=150, Supplier Part Number 1=283-MFLA1206R6800FSCT-ND, Tolerance (%)=1, Category=Resistor, ComponentLink1Description="Manufacturer Website", ComponentLink1URL=http://www.yageo.com, Supplier 1=Digi-Key, Supplier 2=Digi-Key, Supplier 3=Mouser, Supplier Part Number 2=283-MFLA1206R6800FSDKR-ND, Supplier Part Number 3=504-MFLA1206R6800FS
R25: library part RC0603FR-07120RL, "RES 120R SM0603 YAGEO RC_L", Manufacturer=Yageo, Package=0603, Power (Watts)=0.1, Resistance (Ohms)=120, Supplier Part Number 1=9238379, Tolerance (%)=1, Category=Resistor, ComponentLink1Description="Manufacturer Website", ComponentLink1URL=http://www.yageo.com, Manufacturer Part Number=RC0603FR-07120RL, Supplier 1=Farnell, Supplier 2=Digi-Key, Supplier Part Number 2=311-120HRCT-ND
R26: library part RC0603FR-13100KL, "RES 100K SM0603 YAGEO RC_L", Manufacturer=Yageo, Package=0603, Power (Watts)=0.1, Resistance (Ohms)=100000, Supplier Part Number 1=2309107, Tolerance (%)=1, Category=Resistor, ComponentLink1Description="Manufacturer Website", ComponentLink1URL=http://www.yageo.com, Manufacturer Part Number=RC0603FR-13100KL, Supplier 1=Farnell, Supplier 2=Digi-Key
U1: "Fully Integrated Proximity and Ambient Light Sensor with Infrared Emitter, I2C Interface, and Interrupt Function", Manufacturer_Name=Vishay, Mouser Part Number=78-VCNL4040M3OE, Datasheet Link=http://www.vishay.com/docs/84274/vcnl4040.pdf, Geometry.Height=1.15mm, Manufacturer_Part_Number=VCNL4040M3OE, Mouser Price/Stock=https://www.mouser.co.uk/ProductDetail/Vishay-Semiconductors/VCNL4040M3OE?qs=p1ya7m3AA0C%252Buyxak4%252Bv6g%3D%3D, Supplier 1=Mouser, Supplier 2=Digi-Key, Supplier 3=Digi-Key, Supplier Part Number 1=78-VCNL4040M3OE, Supplier Part Number 2=VCNL4040M3OECT-ND, Supplier Part Number 3=VCNL4040M3OEDKR-ND
U2: "TLC272CDRG4, Dual Operational Amplifier 1.7MHz CMOS 5 to 15V, 8-Pin SOIC", Manufacturer_Name="Texas Instruments", Mouser Part Number=595-TLC272CDR, Datasheet Link=http://www.ti.com/lit/ds/symlink/tlc272.pdf, Geometry.Height=1.75mm, Manufacturer_Part_Number=TLC272CDR, Mouser Price/Stock=https://www.mouser.co.uk/ProductDetail/Texas-Instruments/TLC272CDR?qs=xJkDX%2FqrskPeOaaOE3DKWA%3D%3D, Supplier 1=Mouser, Supplier 2=Digi-Key, Supplier 3=Digi-Key, Supplier Part Number 1=595-TLC272CDR, Supplier Part Number 2=296-1310-1-ND, Supplier Part Number 3=296-1310-6-ND
U3: "Proximity Sensors PROX SENS INTER VCSEL I2C-E4, IC SENSORS", Manufacturer_Name=Vishay, Mouser Part Number=78-VCNL36825T, Datasheet Link=https://www.vishay.com/docs/80235/vcnl36825t.pdf, Geometry.Height=0.6mm, Manufacturer_Part_Number=VCNL36825T, Mouser Price/Stock=https://www.mouser.co.uk/ProductDetail/Vishay-Semiconductors/VCNL36825T?qs=pUKx8fyJudAlmgCr9cmOAQ%3D%3D, Supplier 1=Mouser, Supplier 2=Digi-Key, Supplier 3=Digi-Key, Supplier Part Number 1=78-VCNL36825T, Supplier Part Number 2=751-VCNL36825TCT-ND, Supplier Part Number 3=751-VCNL36825TDKR-ND
U4: "Microchip, 24 bit- ADC 153.6ksps, 20-Pin UQFN", Manufacturer_Name=Microchip, Manufacturer_Part_Number=MCP3561RT-E/NC, Mouser Part Number=579-MCP3561RT-E/NC, Supplier Part Number 1=150-MCP3561RT-E/NCCT-ND, Datasheet Link=https://www.microchip.com/content/dam/mchp/documents/APID/ProductDocuments/DataSheets/MCP3561_2_4R-Data-Sheet-DS200006391C.pdf, Geometry.Height=0.6mm, Mouser Price/Stock=https://www.mouser.co.uk/ProductDetail/Microchip-Technology-Atmel/MCP3561RT-E-NC?qs=W%2FMpXkg%252BdQ521c60%252BgBGPA%3D%3D, Supplier 1=Digi-Key, Supplier 2=Digi-Key, Supplier 3=Mouser, Supplier Part Number 2=150-MCP3561RT-E/NCDKR-ND, Supplier Part Number 3=579-MCP3561RT-E/NC
U5: "LTC1992CMS8#PBF Analog Devices, Differential Amplifier 3MHz Rail to Rail Output 8-Pin MSOP", Manufacturer_Name="Analog Devices", Mouser Part Number=584-LTC1992CMS8#PBF, Supplier Part Number 1=505-LTC1992CMS8#PBF-ND, Geometry.Height=1.1mm, Manufacturer_Part_Number=LTC1992CMS8#PBF, Mouser Price/Stock=https://www.mouser.co.uk/ProductDetail/Analog-Devices/LTC1992CMS8PBF?qs=hVkxg5c3xu9zI7TrZNbtXw%3D%3D, Supplier 1=Digi-Key, Supplier 2=Mouser, Supplier Part Number 2=584-LTC1992CMS8#PBF
U6: "4-Channel I2C And SMBus Switch With Reset Functions", Manufacturer_Name="Texas Instruments", Mouser Part Number=595-PCA9546ARGVR, Datasheet Link=http://www.ti.com/lit/gpn/pca9546a, Geometry.Height=1mm, Manufacturer_Part_Number=PCA9546ARGVR, Mouser Price/Stock=https://www.mouser.co.uk/ProductDetail/Texas-Instruments/PCA9546ARGVR?qs=iSMark9AYDVOIxSBd0ujBA%3D%3D, Supplier 1=Mouser, Supplier 2=Digi-Key, Supplier 3=Digi-Key, Supplier Part Number 1=595-PCA9546ARGVR, Supplier Part Number 2=296-21771-1-ND, Supplier Part Number 3=296-21771-6-ND
U7: "Linear Voltage Regulator IC Positive Fixed 1 Output 1A DPAK", Manufacturer_Name=onsemi, Mouser Part Number=863-NCP1117DT33G, Datasheet Link=https://www.onsemi.com/pdf/datasheet/ncp1117-d.pdf, Geometry.Height=2.51mm, Manufacturer_Part_Number=NCP1117DT33G, Mouser Price/Stock=https://www.mouser.co.uk/ProductDetail/onsemi/NCP1117DT33G?qs=Gev%252BmEvV0ib8cFCgG6Q0fQ%3D%3D, Supplier 1=Mouser, Supplier 2=Digi-Key, Supplier Part Number 1=863-NCP1117DT33G, Supplier Part Number 2=NCP1117DT33GOS-ND

## Free pads (board coordinates)
  rect 1.5x1.5 smd: 5(-37.5,-37.5)
  round 5 hole 3.1: MH(47.5,-37.5) MH1(-37.5,-37.5) MH2(-37.5,47.5) MH3(47.5,47.5)

## Via types
v1: diameter 0.7, hole 0.3, Top Layer to Bottom Layer, 167 vias
v2: diameter 1.27, hole 0.711, Top Layer to Bottom Layer, 29 vias
v3: diameter 0.8, hole 0.4, Top Layer to Bottom Layer, 25 vias

## Nets (pads, with @x,y where several pads share a name; then routed paths per layer and width w, separated by ;. In a path a pad name is that pad's centre, name@x,y a point inside that pad or via, vN(x,y) a via of type N, cw(c..) or ccw(c..) an arc to the next point about the centre after c; other vN are vias at no path point)
3.3VA: C2.1 C6.2 C7.2 C10.1 C19.1 L2.1 R26.2 R28.1 U1.4 U4.19 U5.3 | length 23.1
  Top Layer w0.2: C6.2 14.1,-16.143 U4.19
  Top Layer w0.3: U5.3 2.824,-7.904 3,-8.08 C10.1 3.055,-10.3 v2(4,-10.3)
  Top Layer w0.75: C19.1 -13.75,26.5 v2(-9,26.5) -8.952,26.452 -8.19,26.452 -8.142,26.405 L2.1 ; R28.1 5.88,-16.75 6.521,-17.39 6.59,-17.39 v3(6.6,-17.4) ; R28.1@5.905,-16.625 5.905,-16.608 6.8,-15.714 v3(6.8,-15.7) ; U1.4 10.827,9.848 12.125,9.848 C2.1 12.299,9.472 12.299,7.999 v3(12.2,7.9) ; C7.2 11.325,-13.927 12.49,-15.092 12.49,-15.29 v3(12.5,-15.3) 12.514,-15.3 12.566,-15.352 13.309,-15.352 C6.2 ; v3(11.4,-8.8) 11.41,-8.79 11.687,-8.79 12.05,-8.427 R26.2
  other v2: -12.5,26.5 -10.75,26.5
3.3VD: C1.1 C4.1 C5.1 C8.2 C9.2 C18.2 C21.2 L2.2 R12.2 R13.2 R14.2 R15.2 R16.2 R17.2 U1.3 U3.4 U4.18 U6.14 U7.2 | length 30.9
  Top Layer w0.2: C5.1 0.723,13.37 0.723,12.677 v2(0.9,12.5) ; U3.4 0.375,11.87 0.9,12.395 v2(0.9,12.5) ; C4.1 1.7,12.297 1.103,12.297 v2(0.9,12.5) ; R15.2 2.454,20 v1(3.2,20) ; v1(3.4,19.2) 4.273,19.2 R17.2 ; R14.2 4.427,24 v1(5.2,24) ; v3(6.2,16.2) R16.2 ; U6.14 8.725,25.498 C18.2 8.927,25.5 v2(10,25.5) ; R12.2 12.973,25.9 v1(13.8,25.9) ; U4.18 14.5,-16.227 C8.2 C8.2@15.3,-15.427 ; v1(15.9,25.9) R13.2
  Top Layer w0.75: C21.2 U7.2@-3.125,31.573 ; L2.2 -6.575,26.405 -6.48,26.5 -6.48,26.525 v2(-5.623,27.382) -5.623,29.075 U7.2@-3.125,31.573 ; U7.2 -2.925,31.573 U7.2@-3.125,31.573 ; v3(9.2,9.4) 9.211,9.4 9.848,8.763 9.848,8.404 C1.1 ; v3@9.2,9.691 U1.3 ; C8.2@15.3,-15.427 C9.2
  other v2: 16.1,-16 -4,30 -1,30 -4,33 -1,33
ADD1_1: J1.5 J3.25 | length 28.4
  Top Layer w0.254: J1.5 44.112,39.608 44.112,39.188 50.25,33.05 50.25,17.874 J3.25 J3.25@47.367,14.991
ADD1_2: J2.5 J3.17 | length 113
  Top Layer w0.254: J2.5 -33.1,-30.4 -25.75,-37.75 37,-37.75 40,-34.75 40,-23 50,-13 50,-7.5 J3.17@47.598,-5.098
CT_1: J1.11 J3.23 | length 33.7
  Top Layer w0.254: J1.11 45.912,39.608 45.912,39.088 51.75,33.25 51.75,14.294 J3.23
CT_2: J2.11 J3.19 | length 127.8
  Top Layer w0.254: J2.11 -34.912,-29.632 -34.912,-30.116 -36.696,-31.9 -36.696,-33.146 -30.592,-39.25 37.75,-39.25 41.5,-35.5 41.5,-24 51.5,-14 51.5,-4 J3.19@47.558,-0.058
EN_1: J1.9 J3.24 | length 31
  Top Layer w0.254: J1.9 45.312,39.608 45.312,38.888 51,33.2 51,16.084 J3.24 J3.24@47.392,12.476
EN_2: J2.9 J3.18 | length 122.9
  Top Layer w0.254: J2.9 -34.312,-29.632 -34.312,-30.158 -36.242,-32.088 -36.242,-32.958 -30.7,-38.5 37.5,-38.5 40.75,-35.25 40.75,-23.5 50.75,-13.5 50.75,-5.826 J3.18
GND: C1.2 C2.2 C3.2 C4.2 C5.2 C6.1 C7.1 C8.1 C9.1 C10.2 C11.2 C12.2 C13.2 C17.2 C18.1 C20.2 C21.1 C22.1 C23.2 C24.2 D3.1 D3.3 D4.1 J1.15 J2.15 J3.28 J5.3 J5.4 J6.3 J6.4 M1.1 pad.5 pad.MH pad.MH1 pad.MH2 pad.MH3 R18.1 R19.1 R20.1 R23.1 R25.1 R27.1 U1.1 U2.4 U3.3 U4.1 U4.17 U4.20 U4.21 U6.6 U6.11 U6.15 U6.16 U6.17 U7.1 | length 72.9
  Top Layer w0.2: U3.3 0.375,11.17 v3(1.102,10.443) C4.2 ; C5.2 2.147,13.8 v3(3.2,13.8) ; v3(6.1,10.6) 6.85,10.6 U1.1 ; v1(7.2,24.7) 7.2,24.565 7.35,24.415 7.35,23.925 U6.16 7.425,22.975 U6.17@8.075,22.325 ; C18.1 7.425,25.548 v1@7.425,24.7 ; v3(7.7,8) 7.725,8.025 C1.2 ; v1(8.074,19.113) U6.6 8.075,21.675 U6.17 ; U6.15 U6.17@8.075,22.325 ; v3(8.4,-14.9) 8.515,-15.015 8.515,-15.269 9.179,-15.933 C12.2 9.594,-16.273 C11.2 12.21,-17.163 12.21,-17.46 12.7,-17.95 U4.1 U4.21@13.7,-17.95 ; v1(11.2,22.2) 11.138,22.263 10.312,22.263 U6.11 8.725,22.325 U6.17 ; C2.2 12.573,11.6 v3(13.6,11.6) ; v3(13.25,-17.5) U4.21@13.7,-17.95 ; U4.17 14.9,-18.35 U4.21 U4.21@13.7,-17.95 ; U6.17@8.075,22.325 U6.17
  Top Layer w0.3: v3(-36.8,-29.7) -36.76,-29.66 -36.135,-29.66 -36.1,-29.625 J2.15 ; R19.1 -14.046,-16.9 v2(-12.9,-16.9)
  Top Layer w0.5: v3(-18.4,4.5) -18.2,4.3 R25.1 ; v3(-15.7,-0.7) -14.816,-0.7 U2.4 ; R23.1 v3(-8.725,-0.127) -7.727,-1.125 C24.2 ; C3.2@-8.33,-5.243 -7.507,-5.243 v3(-7.45,-5.3) ; D4.1 -1.6,-1.5 v2(-1.6,-0.5) ; C10.2 3.096,-11.904 4.154,-11.904 v2(4.25,-12) 4.346,-11.904 5.404,-11.904 C13.2 ; v2(7.4,-3.4) 7.427,-3.427 7.427,-4.573 C17.2 ; R27.1 13.914,-8.414 14.787,-8.414 v3(14.8,-8.4)
  Top Layer w0.75: R18.1 -10.248,34.775 -10.248,34.139 -9.75,33.641 v2(-9.75,33.5) -9.714,33.463 -8.04,33.463 C21.1 ; C23.2 v2(-6.7,-22) ; U7.1 4.982,29.315 7.292,31.625 7.925,31.625 C22.1 8.3,31.8 12.3,31.8 C20.2 ; C7.1 11.525,-12.348 12.407,-12.348 12.659,-12.6 v2(12.8,-12.6) 12.8,-12.741 13.309,-13.249 13.309,-13.898 C6.1 ; C8.1 15.801,-13.472 15.801,-12.999 v2(15.9,-12.9) 15.999,-12.999 16.668,-12.999 17.241,-13.573 C9.1 ; R20.1 22.054,36.84 25,39.786 M1.1@25,41
  other v1: -30,-42.5 -25,-42.5 -20,-42.5 -15,-42.5 -10,-42.5 -5,-42.5 0,-42.5 5,-42.5 10,-42.5 15,-42.5 20,-42.5 25,-42.5 30,-42.5 35,-42.5 40,-42.5 -35,-40 45,-40 50,-40 -40.261,-39.842 -40,-35 -30.015,-34.991 45,-35 50,-35 -40,-30 45,-30 -40,-25 -35,-25 -30,-25 -25,-25 -20,-25 -15,-25 -5,-25 0,-25 5,-25 10,-25 15,-25 20,-25 25,-25 45,-25 -40,-20 -35,-20 -30,-20 -25,-20 -20,-20 -5,-20 0,-20 5,-20 25,-20 50,-20 -40,-15 -35,-15 -30,-15 -15,-15 -10,-15 -5,-15 0,-15 40,-15 -40,-10 -35,-10 -30,-10 -15,-10 -10,-10 -5,-10 40,-7.5 -40,-5 -35,-5 -30,-5 -5,-5 15,-5 20,-5 -14.92,-4.502 10.065,-0.188 -40,0 -35,0 -30,0 0,0 5,0 15,0 20,0 -40,5 -35,5 -30,5 5,5 10,5 15,5 20,5 50,5 -40,10 -35,10 -30,10 -15,10 -5,10 0,10 15,10 20,10 -40,15 -35,15 -30,15 -15,15 -10,15 15,15 20,15 -40,20 -35,20 -30,20 -15,20 -10,20 -5,20 20,20 -15.016,24.585 -40,25 -35,25 -30,25 -10,25 -5,25 0,25 45,25 -40,30 -35,30 -30,30 10,30 15,30 45,30 -40,35 -35,35 -30,35 -15,35 10,35 15,35 45,35 -4.992,35.249 -40,40 -35,40 -30,40 40,40 -40,45 -35,45 -30,45 35,45 40,45 50,45 -35,50 -30,50 -25,50 -20,50 -15,50 -10,50 -5,50 0,50 5,50 10,50 15,50 20,50 25,50 30,50 35,50 40,50 45,50 50,50
  other v2: 6.6,30.8 9.9,31.8
  other v3: 47.9,39.6
INT_1: J1.13 J3.22 | length 36.6
  Top Layer w0.254: J1.13 46.5,39.3 52.5,33.3 52.5,12.504 J3.22
INT_2: J2.13 J3.20 | length 132.8
  Top Layer w0.254: J2.13 -35.512,-29.632 -35.512,-30.074 -37.15,-31.712 -37.15,-33.45 -30.6,-40 38,-40 42.25,-35.75 42.25,-24.5 52.25,-14.5 52.25,-2 47.786,2.464 J3.20
NetC11_1: C11.1 C12.1 R28.2 U4.2 | length 6.3
  Top Layer w0.2: R28.2 7.534,-16.8 7.784,-17.05 7.884,-17.05 8.071,-17.237 8.704,-17.237 C12.1 9.315,-17.727 C11.1 11.944,-18.35 U4.2
NetC13_1: C13.1 U5.6 | length 3.6
  Top Layer w0.3: C13.1 5.5,-9.5 5.095,-9.095 5.095,-8.162 5.332,-7.925 6.191,-7.925 U5.6
NetC14_1: C14.1 R4.1 R7.2 U5.5 | length 6.1
  Top Layer w0.3: U5.5 6.212,-9.3 7.166,-10.255 R4.1 ; U5.5@6.212,-8.533 7.223,-8.533 7.35,-8.406 R7.2 9.916,-8.406 C14.1
NetC14_2: C14.2 R7.1 R26.1 R27.2 U5.8 | length 7.8
  Top Layer w0.3: U5.8 6.233,-6.625 7.223,-6.625 7.35,-6.752 R7.1 9.916,-6.752 C14.2 10.096,-6.773 R26.1 R27.2
NetC15_1: C15.1 R8.2 R10.1 U5.4 | length 5.9
  Top Layer w0.3: C15.1 -1.981,-8.329 R8.2 0.65,-8.329 0.854,-8.533 U5.4@1.788,-8.533 ; R10.1 1.346,-10.255 1.788,-9.812 U5.4
NetC15_2: C15.2 J4.1 R8.1 U5.1 | length 10.9
  Top Layer w0.3: C15.2 -1.827,-6.675 R8.1 0.65,-6.675 0.7,-6.625 1.767,-6.625 U5.1 2.275,-6.604 2.351,-6.529 2.351,-5.949 5.656,-2.644 5.656,-2.35 J4.1
NetC16_1: C16.1 R4.2 U4.3 | length 15.9
  Top Layer w0.2: C16.1 4.8,-13.71 4.8,-17.5 6.3,-19 11.75,-19 12,-18.75 U4.3
  Top Layer w0.3: C16.1 5.327,-13.183 5.892,-13.183 7.166,-11.909 R4.2
NetC16_2: C16.2 R10.2 U4.4 | length 17.3
  Top Layer w0.2: C16.2 3.7,-13.71 3.7,-17.6 5.6,-19.5 12,-19.5 12.35,-19.15 U4.4
  Top Layer w0.3: R10.2 1.346,-11.909 2.62,-13.183 3.173,-13.183 C16.2
NetC17_1: C17.1 U5.2 U5.7 | length 7.1
  Top Layer w0.3: U5.2 U5.7 ; 4.9,-7.1 4.9,-5.778 5.65,-5.028 5.65,-4.95 5.745,-4.855 C17.1@5.823,-4.855
NetC19_2: C19.2 R18.2 | length 3.8
  Top Layer w0.75: C19.2 -14,32.525 -11.952,34.573 -11.952,34.775 R18.2
NetC25_1: C25.1 R22.1 U2.2 | length 5.4
  Top Layer w0.3: U2.2 -12.265,1.365 C25.1 -12,1.9 R22.1
NetC25_2: C25.2 R21.1 U2.1 | length 5.5
  Top Layer w0.3: U2.1 -10.995,1.451 C25.2 -10.1,2.346 R21.1
NetD2_2: D2.2 Q1.1 Q1.2 Q1.5 Q1.6 Q1.P1 | length 6
  Top Layer w0.75: Q1.P1 -6.225,4.75 D2.2
NetD3_2: D3.2 J4.2 | length 5.1
  Top Layer w0.5: J4.2 8.256,2.819 8.5,3.063 D3.2
NetD4_2: D4.2 J4.3 | length 2.9
  Top Layer w0.5: D4.2 J4.3
NetJ3_2: J3.2 R24.2 | length 86.8
  Top Layer w0.2: R24.2 -17.227,6.1 -16.327,7 -14.617,7 3.56,25.177 4.177,25.177 6.7,27.7 17,27.7 24.8,35.5 40,35.5 43.75,31.75 43.75,21.494 J3.2
NetJ3_3: J3.3 U3.1 | length 76.3
  Top Layer w0.2: U3.1 -1.175,11.17 -1.375,11.37 -1.499,11.37 -2.5,12.371 -2.5,18.551 3.726,24.777 4.477,24.777 6.9,27.2 17.4,27.2 25,34.8 39.7,34.8 43.2,31.3 43.2,19.504 J3.3
NetJ3_4: J3.4 R14.1 U3.6 U6.1 U6.2 | length 78.8
  Top Layer w0.2: U3.6 -2,12.745 -2,18.424 2.049,22.473 R14.1 6.052,22.473 6.2,22.325 U6.2 U6.1 6.55,26.201 7.049,26.7 17.8,26.7 25.4,34.3 39.5,34.3 42.7,31.1 42.7,17.464 J3.4
NetJ3_5: J3.5 R12.1 U6.13 | length 57.5
  Top Layer w0.2: U6.13 12.477,23.85 12.8,24.173 R12.1 13,24.173 13.889,25.062 17.162,25.062 25.8,33.7 39.334,33.7 42.1,30.934 42.1,15.524 J3.5
NetJ3_6: J3.6 R13.1 U6.12 | length 58.5
  Top Layer w0.2: U6.12 13.702,22.975 14.9,24.173 15,24.173 17.273,24.173 26.2,33.1 39.1,33.1 41.5,30.7 41.5,13.584 J3.6
NetJ3_7: J3.7 U1.6 | length 67.6
  Top Layer w0.2: U1.6 9.212,11.8 9.463,12.05 9.463,15.162 26.9,32.6 38.7,32.6 40.8,30.5 40.8,11.744 J3.7
NetJ3_8: J3.8 R2.2 | length 84
  Top Layer w0.2: R2.2 23.077,-9.4 24.5,-7.977 24.5,28.75 27.75,32 38.5,32 40.1,30.4 40.1,9.65 44.746,5.004 J3.8
NetJ3_9: J3.9 R3.2 | length 87.4
  Top Layer w0.2: R3.2 23.077,-11.65 25.25,-9.477 25.25,28.5 28.25,31.5 38,31.5 39.5,30 39.5,7.5 44.536,2.464 J3.9
NetJ3_10: J3.10 R5.2 | length 90.3
  Top Layer w0.2: R5.2 23.077,-13.9 26,-10.977 26,28.25 28.75,31 37.5,31 39,29.5 39,5.924 J3.10
NetJ3_11: J3.11 R6.2 | length 93.5
  Top Layer w0.2: R6.2 23.077,-16.15 23.327,-15.9 23.427,-15.9 26.75,-12.577 26.75,28 29.25,30.5 37,30.5 38.5,29 38.5,3.884 J3.11
NetJ3_12: J3.12 R9.2 | length 96.7
  Top Layer w0.2: R9.2 23.077,-18.4 23.327,-18.15 23.427,-18.15 27.5,-14.077 27.5,27.75 29.75,30 36.5,30 38,28.5 38,1.844 J3.12
NetJ3_13: J3.13 R11.2 | length 100
  Top Layer w0.2: R11.2 23.077,-20.65 23.327,-20.4 23.427,-20.4 28.25,-15.577 28.25,27.5 30.25,29.5 36,29.5 37.5,28 37.5,-0.196 J3.13
NetJ3_21: J3.21 J5.1 J5.2 J6.1 J6.2 | length 55.3
  Top Layer w0.254: J5.2 J5.1 43.48,-34.77 J6.2 J6.1 51,-18.893 53,-16.893 53,-0.456 J3.21
NetQ1_3: Q1.3 R21.2 | length 3
  Top Layer w0.3: R21.2 -7.627,6.127 -7.25,5.75 Q1.3
NetQ1_4: Q1.4 Q1.P2 R1.1 R22.2 R23.2 | length 10.9
  Top Layer w0.3: R1.1 -13.687,6.14 -12.013,6.14 R22.2 -11.1,6.127 -10.9,5.927 -10.9,5.632 -10.441,5.173 -8.915,5.173 -8.542,4.8 Q1.P2 -7.25,4.782 Q1.4 -7.25,2.925 -6.075,1.75 R23.2
NetR2_1: R2.1 U4.16 | length 11.7
  Top Layer w0.2: U4.16 17.684,-17.25 19.5,-15.434 19.5,-11.523 21.423,-9.6 R2.1
NetR3_1: R3.1 U4.15 | length 9.5
  Top Layer w0.2: U4.15 17.8,-17.95 20,-15.75 20,-13.273 21.423,-11.85 R3.1
NetR5_1: R5.1 U4.14 | length 7.9
  Top Layer w0.2: U4.14 18.15,-18.35 20.5,-16 20.5,-14.923 R5.1
NetR6_1: R6.1 U4.13 | length 6.5
  Top Layer w0.2: U4.13 18.5,-18.75 20.89,-16.36 21.313,-16.36 R6.1
NetR9_1: R9.1 U4.12 | length 5.7
  Top Layer w0.2: U4.12 20.35,-19.15 20.75,-18.75 21.173,-18.75 R9.1
NetR11_1: R11.1 U4.11 | length 6
  Top Layer w0.2: U4.11 20.323,-19.55 21.423,-20.65 R11.1
NetR15_1: R15.1 U3.5 U6.3 | length 16.2
  Top Layer w0.2: U3.5 -0.422,11.87 -0.522,11.97 -0.522,12.222 -1.5,13.2 -1.5,18.1 1.688,21.288 2.088,21.288 R15.1 2.475,21.675 U6.3
NetR16_1: R16.1 U1.8 U6.5 | length 9.2
  Top Layer w0.2: R16.1 R16.1@6.3,18.655 ; U1.8 7.05,17.905 R16.1@6.3,18.655 ; U6.5 7.35,20.075 7.35,19.705 R16.1@6.3,18.655
NetR17_1: R17.1 U1.7 U6.4 | length 14.6
  Top Layer w0.2: R17.1 5.073,20.827 ; U6.4 6.2,21.025 6.002,20.827 5.073,20.827 ; U1.7 7.882,11.557 7.882,11.306 7.726,11.15 6.563,11.15 5.3,12.413 5.3,20.6 5.073,20.827
NetR24_1: R24.1 R25.2 U2.3 | length 7.6
  Top Layer w0.2: R24.1 -15.573,4.327 R25.2 -15.6,1.815 -13.535,-0.25 U2.3
NetU1_2: U1.2 U1.5 | length 2.8
  Top Layer w0.2: U1.2 8.137,10.4 8.388,10.65 8.388,10.724 8.763,11.1 9.637,11.1 10.012,11.476 10.012,11.55 10.262,11.8 U1.5
SCL_1: J1.3 J3.26 | length 25.6
  Top Layer w0.254: J1.3 43.5,39 49.5,33 49.5,19.664 J3.26 J3.26@47.247,17.411
SCL_2: J2.3 J3.16 | length 107.5
  Top Layer w0.254: J2.3 -32.5,-29.9 -25.4,-37 36.5,-37 39.25,-34.25 39.25,-22.5 49.25,-12.5 49.25,-9.5 J3.16@47.493,-7.743
SDA_1: J1.1 J3.27 | length 22.3
  Top Layer w0.254: J1.1 42.9,38.9 48.8,33 48.8,21.504 J3.27
SDA_2: J2.1 J3.15 | length 101.5
  Top Layer w0.254: J2.1 -31.9,-29.701 -31.888,-29.713 -31.807,-29.713 -25.27,-36.25 36,-36.25 38.5,-33.75 38.5,-22 47.54,-12.96 J3.15
VIN: C3.1 C20.1 C22.2 C23.1 C24.1 D2.1 J1.6 J1.7 J1.8 J2.6 J2.7 J2.8 J3.1 R1.2 R19.2 R20.2 U2.8 U7.3 | length 49.3
  Top Layer w0.254: -33.7,-32.38 J2.7@-33.7,-29.713 ; J2.7@-33.7,-29.527 v2(-33.7,-28.6) ; J1.7 44.7,42.38 44.7,43.207 v2(44.731,43.239)
  Top Layer w0.3: J2.8 -33.7,-32.38 J2.6 ; v3(-14.3,3.6) -14.204,3.696 -14.204,4.096 -13.8,4.5 R1.2 ; U2.8 -10.995,-6.55 -10.818,-6.727 -9.527,-6.727 ; v3(-10,-7.2) -9.527,-6.727 ; C3.1 -9.527,-6.727 ; C3.1@-8.625,-6.727 -7.327,-6.727 v3(-7.3,-6.7) ; J1.6 44.7,42.38 J1.8
  Top Layer w0.75: R19.2 -15.8,-20.7 v2(-17.1,-22) C23.1 ; C24.1 -5.873,-1.227 -5.598,-1.502 v3(-4.5,-1.5) -1.125,1.875 -0.625,1.875 D2.1 ; U7.3 4.498,34.101 6.501,34.101 v2(6.6,34.2) 6.741,34.2 6.912,34.029 7.925,34.029 C22.2 8.227,33.727 9.673,33.727 v2(9.7,33.7) 15.659,33.7 16.159,33.2 v2(16.3,33.2) 16.3,32.225 16.825,31.7 17.775,31.7 18.3,32.225 18.3,33.21 18.465,33.375 19.575,33.375 20.325,34.125 20.375,34.125 20.4,34.15 R20.2
  other v2: 18.3,33.2
pads on no net: J1.2 J1.4 J1.10 J1.12 J1.14 J2.2 J2.4 J2.10 J2.12 J2.14 J3.14 U2.5 U2.6 U2.7 U3.2 U4.5 U4.6 U4.7 U4.8 U4.9 U4.10 U6.7 U6.8 U6.9 U6.10

## Polygon pours and split planes (outlines as drawn)
3.3VA on Bottom Layer "3.3VA_L04_P005" (solid, pour order 5): -17.2,35.4 -7.9,35.4 -7.9,14.3 12.6,7.8 12.6,-11.7 14.2,-13.3 14.2,-25.7 0.9,-25.7 0.9,2.8 -17.2,8.645
VIN on Bottom Layer "VIN_L04_P007" (solid, pour order 7): 3,35.5 3,29.5 37.5,29.5 37.75,29.25 37.75,-35.75 -28.25,-35.75 -28.25,46.5 37.5,46.5 37.5,53.247 -42.75,53.247 -42.75,-42.75 52.75,-42.75 52.75,53.247 37.5,53.247 37.5,35.25 37.25,35.5
VIN on Bottom Layer "VIN_L04_P008" (solid, pour order 8): -17.3,7.8 0.2,2.5 0.2,-25.9 -28.4,-25.9 -28.4,-19.6 -17.3,-19.6
3.3VD on Bottom Layer "3.3VD_L04_P006" (solid, pour order 6): 2.3,28.8 2.3,35.4 -6.9,35.4 -6.9,27.95 -6.9,14.6 13.1,8.1 13.1,-11.3 15,-13.2 15,-25.8 26.8,-25.8 26.8,-20.4 26.8,28.8
GND on Layer 1 "GND_L02_P000" (solid, pour order 0): -45,55.25 55,55.25 55,-45 -45,-45
GND on Top Layer "GND_L01_P001" (solid, remove dead copper, pour order 1): -44.956,55.128 55.044,55.128 55.044,-45.122 -44.956,-45.122
GND on Layer 2 "GND_L03_P009" (solid, pour order 9): -44.956,55.128 55.044,55.128 55.044,-45.122 -44.956,-45.122

## Silkscreen, mask and mechanical layers (free items; w line width, h text height)
Mechanical 1:
  lines w0.01: -45,-43.247 -45,53.247 cw(c-43.247,53.247) -43.247,55 53.247,55 cw(c53.247,53.247) 55,53.247 55,-43.247 cw(c53.247,-43.247) 53.247,-45 -43.242,-45 ; -44.995,-43.242 ccw(c-43.242,-43.242) -43.242,-44.995